# Altium PCB Pedal System Circuit.PcbDoc
Units mil, origin at the board's own origin, x right, y up, seen from the top; angles counter-clockwise.
Board outline 3187.01 x 2249.61 mil, 2 copper layers (Top, Bottom); 19 components, 18 nets, 84 pads, 0 vias.
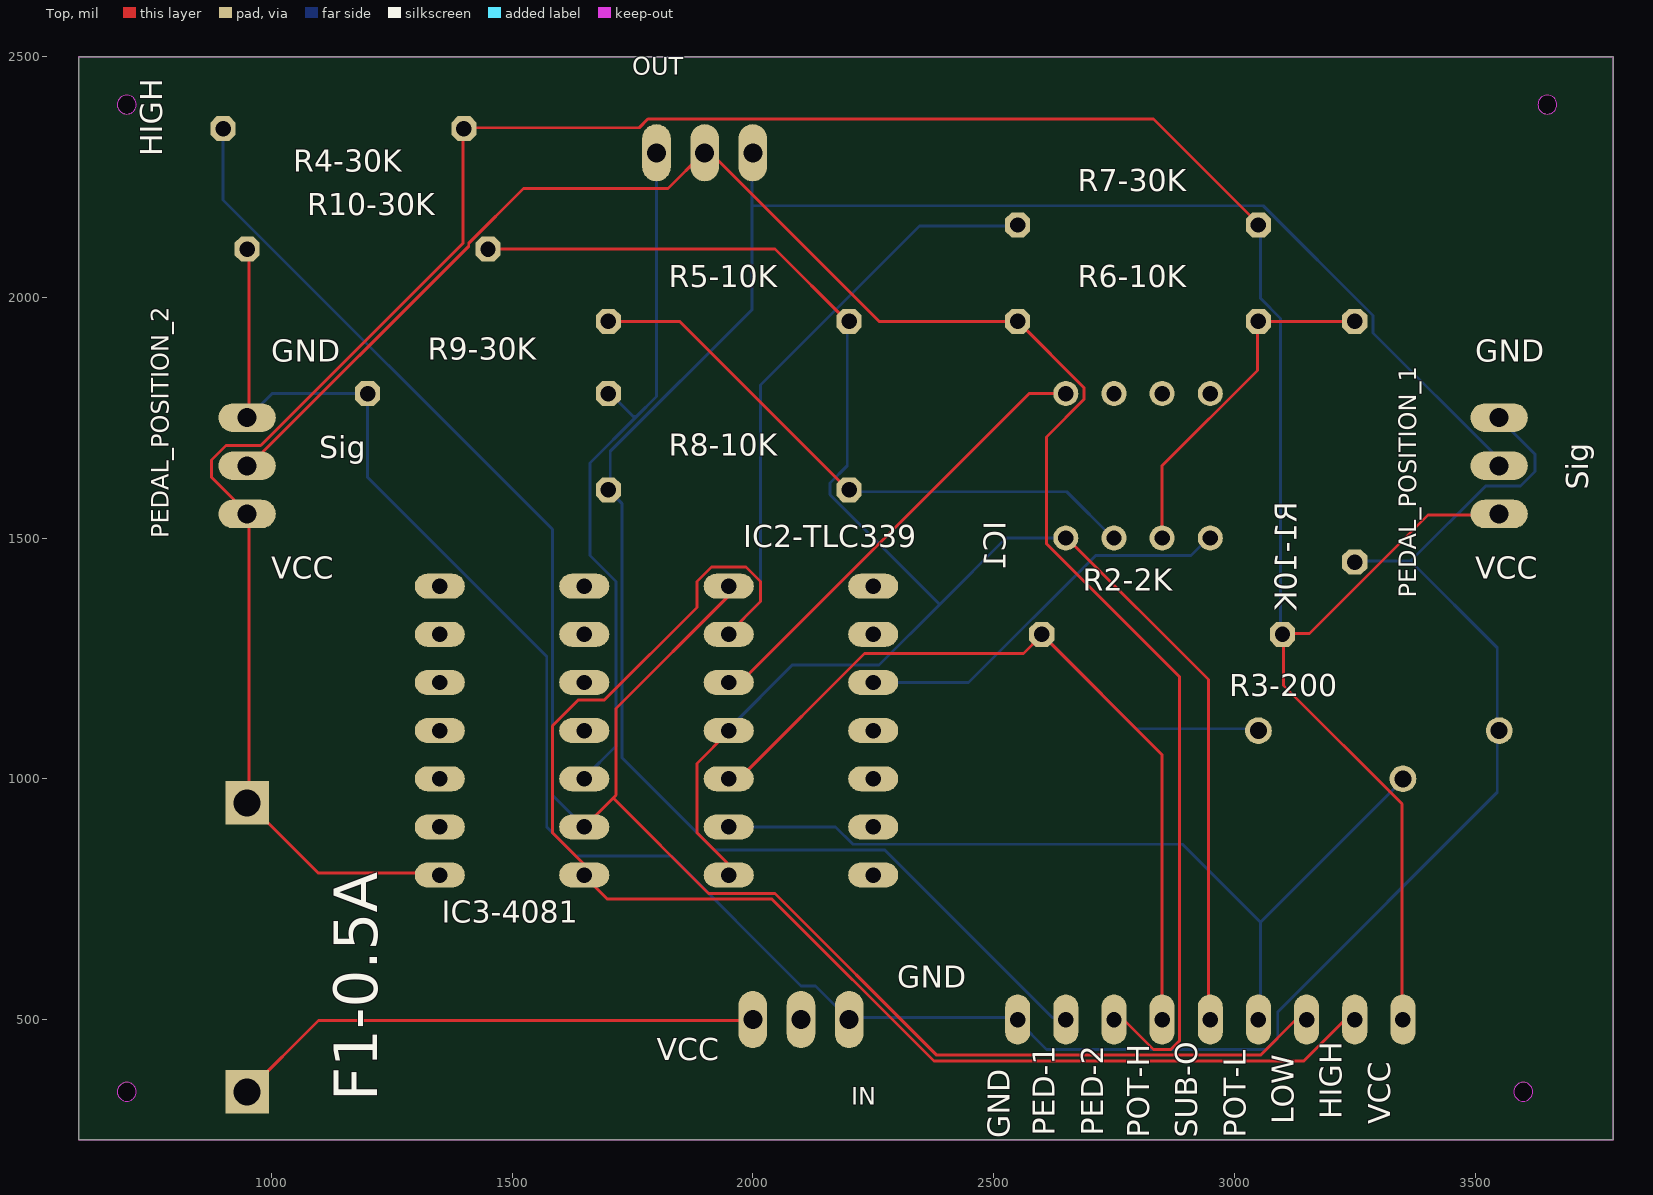
[diagram p0: Top view]
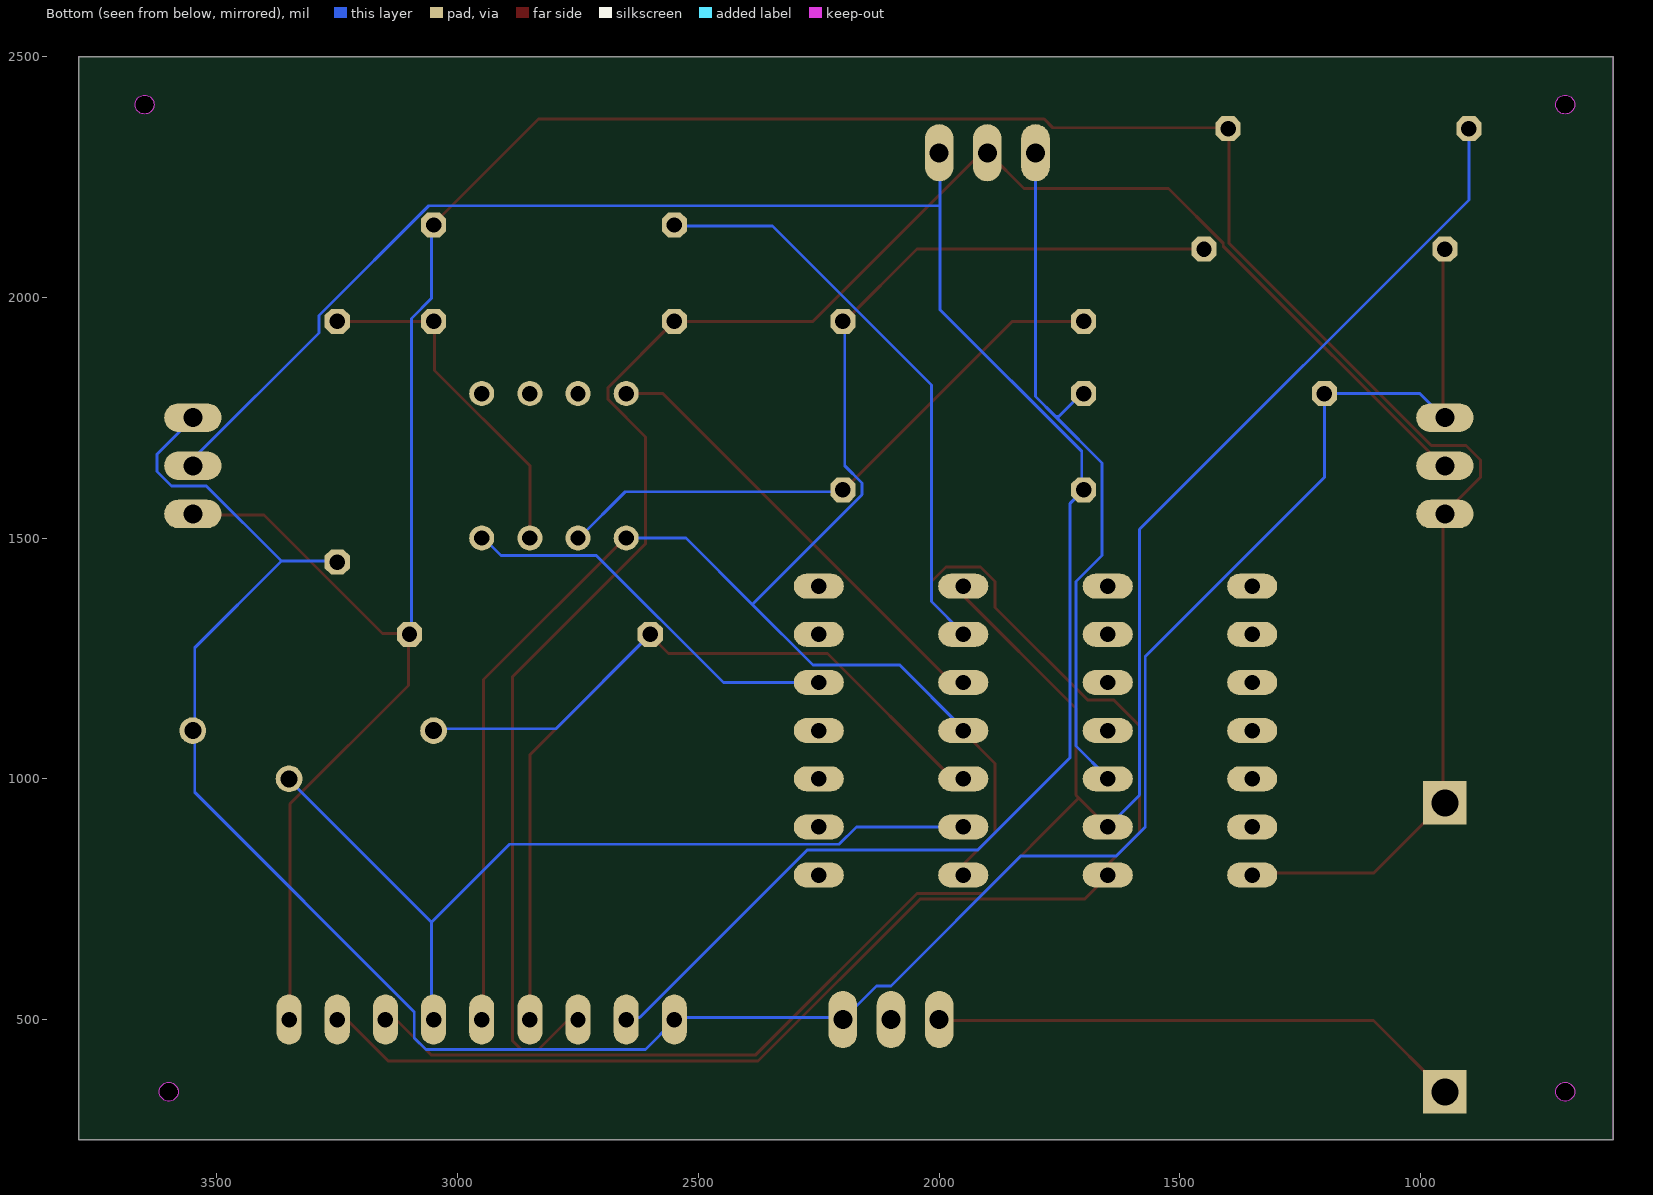
[diagram p1: Bottom view, seen from below]

## Layer stack, top to bottom
Top Solder: solder mask 0.4, Solder Resist, Dk 3.5
Top: signal copper 1.378
Dielectric 1: dielectric 12.6, FR-4, Dk 4.8
Bottom: signal copper 1.378
Bottom Solder: solder mask 0.4, Solder Resist, Dk 3.5

## Board outline
600,2499.61 600,250 3787.01,250 3787.01,2499.61
cut-out: 3600,330.31 ccw(c3600,350) 3619.68,350 ccw(c3600,350) 3600,369.69 ccw(c3600,350) 3580.32,350 ccw(c3600,350)
cut-out: 700,330.31 ccw(c700,350) 719.68,350 ccw(c700,350) 700,369.69 ccw(c700,350) 680.32,350 ccw(c700,350)
cut-out: 700,2380.32 ccw(c700,2400) 719.68,2400 ccw(c700,2400) 700,2419.68 ccw(c700,2400) 680.32,2400 ccw(c700,2400)
cut-out: 3650,2380.32 ccw(c3650,2400) 3669.68,2400 ccw(c3650,2400) 3650,2419.68 ccw(c3650,2400) 3630.32,2400 ccw(c3650,2400)

## Design rules (kind name [scope] priority, off if disabled: settings)
BoardOutlineClearance mdCopperDimension [All] p1: gap=10 ignorepadtopadclearanceinfootprint=FALSE except(0: Arc-SplitContinuation Track-SplitContinuation SMDPad-SplitContinuation THPad-SplitContinuation Via-SplitContinuation Fill-SplitContinuation Poly-SplitContinuation Region-SplitContinuation Text-SplitContinuation; 40: Poly-OutlineEdge Poly-CavityEdge Poly-CutoutEdge Poly-SplitBarrior)
Clearance "Clearance (Same Net)" [All] p1: gap=6 ignorepadtopadclearanceinfootprint=FALSE
Clearance [All] p2: gap=6 ignorepadtopadclearanceinfootprint=FALSE
HoleSize [All] p1: absolutevalues=TRUE maxlimit=100000 minlimit=13.78 maxpercent=80.000 minpercent=20.000
HoleToHoleClearance mdDrill [All] p1: gap=6 allowstackedmicrovias=TRUE
MinimumSolderMaskSliver [All] p1 off: minsoldermaskwidth=10
PasteMaskExpansion mlMinCreamFrame [All] p1: expansion=0
PolygonConnect PolygonConnect_For_PolygonThermal_ON_Width60000_Gap100000 [InPolygonClass('PolygonThermal_ON_Width60000_Gap100000') vs Not IsVia] p1: connectstyle=Relief reliefconductorwidth=6 reliefentries=4 polygonreliefangle="90 Angle" airgapwidth=10
PolygonConnect ThermalVias [IsVia] p2: connectstyle=Direct reliefconductorwidth=10 reliefentries=4 polygonreliefangle="90 Angle" airgapwidth=10
PolygonConnect [All] p3: connectstyle=Relief reliefconductorwidth=10 reliefentries=4 polygonreliefangle="90 Angle" airgapwidth=10
RoutingVias [All] p1: holewidth=13.78 width=29.78 viastyle="Through Hole" minholewidth=13.78 minwidth=29.78 maxholewidth=100 maxwidth=100
SolderMaskExpansion mlMinStopFrame [All] p1: expansion=4 istentingtop=FALSE
Width [All] p1: maxlimit=10 minlimit=6 preferedwidth=6
26 further rules are at their usual default settings.

## Classes and differential pairs
polygon class PolygonThermal_ON_Width60000_Gap100000: Polygon_1_Net_N$11 Polygon_1_Net_N$13

## Components (designator, comment, footprint, x,y, rotation, side; value= is the part's Value field where it differs from the comment)
F1-0.5A "FUSEBLANK_5X20MM" FUSE_HOLDER_5X20MM 950,350 r90 top
GND "" FE09W 2950,500 r0 top
IC1 "LM358N" DIL08 2800,1650 r0 top
IC2-TLC339 "TLC339P" DIL14 2100,1100 r270 top
IC3-4081 "4081N" DIL14 1500,1100 r90 top
IN "22-23-2031" 22-23-2031 2100,500 r180 top
OUT "22-23-2031" 22-23-2031 1900,2300 r0 top
PEDAL_POSITION_1 "22-23-2031" 22-23-2031 3550,1650 r270 top
PEDAL_POSITION_2 "22-23-2031" 22-23-2031 950,1650 r90 top
R1-10K "10k" 0207/12 3250,1700 r90 top
R2-2K "2k" 0309/12 2850,1300 r0 top
R3-200 "200" RTRIM43P 3350,1050 r0 top
R4-30K "30k" 0207/12 1150,2350 r180 top
R5-10K "10k" 0207/12 1950,1950 r0 top
R6-10K "10k" 0207/12 2800,1950 r0 top
R7-30K "30k" 0207/12 2800,2150 r0 top
R8-10K "10k" 0207/12 1950,1600 r0 top
R9-30K "30k" 0207/12 1450,1800 r0 top
R10-30K "30k" 0207/12 1200,2100 r0 top

## Footprints (in the part's own frame and the unit in brackets; to place one, negate y for a bottom-side part, rotate by r counter-clockwise, add the part's x,y. Pads: shape width x height; smd on the part's side, far side on the other; paste and mask are expansions set on the pad)
22-23-2031 [mm] "22-23-2031"
  oval 1.508x3.016 hole 1: 1(-2.54,0) 2(0,0) 3(2.54,0)
  body extent -3.3,-1.51 3.3,1.51, height 1.27
0207/12 [mil] "0207/12"
  oct 52x52 / inner round 48.04 / far side oct 52x52 hole 32: 1(-250,0) 2(250,0)
  body extent -274,-24 274,24, height 150
0309/12 [mil] "0309/12"
  oct 52x52 / inner round 48.04 / far side oct 52x52 hole 32: 1(-250,0) 2(250,0)
  body extent -274,-24 274,24, height 150
DIL08 [mil] "DIL08"
  round 52 hole 32: 1(-150,-150) 2(-50,-150) 3(50,-150) 4(150,-150) 5(150,150) 6(50,150) 7(-50,150) 8(-150,150)
  body extent -176,-176 176,176, height 50
DIL14 [mil] "DIL14"
  oval 52x104 hole 32: 1(-300,-150) 2(-200,-150) 3(-100,-150) 4(0,-150) 5(100,-150) 6(200,-150) 7(300,-150) 8(300,150) 9(200,150) 10(100,150) 11(0,150) 12(-100,150) 13(-200,150) 14(-300,150)
  body extent -326,-202 326,202, height 50
FE09W [mil] "FE09W"
  oval 52x104 hole 32: 1(-400,0) 2(-300,0) 3(-200,0) 4(-100,0) 5(0,0) 6(100,0) 7(200,0) 8(300,0) 9(400,0)
  body extent -426,-52 426,52, height 150
FUSE_HOLDER_5X20MM [mil] "FUSE_HOLDER_5X20MM"
  rect 90x90 / inner round 83.15 / far side rect 90x90 hole 56: 1(0,0) 2(600,0)
  body extent -42,-42 642,42, height 50
RTRIM43P [mil] "RTRIM43P"
  round 55.43 hole 35.43: 1(-300,50) 2(0,-50) 3(200,50)
  body extent -328,-78 228,78, height 50

## Part data
F1-0.5A: library part FUSE_HOLDER_5X20MM, PackageName=FUSE_HOLDER_5X20MM
GND: library part FE09W, PackageName=FE09W
IC1: library part DIL08, PackageName=DIL08
IC2-TLC339 IC3-4081: library part DIL14, PackageName=DIL14
R1-10K R4-30K R5-10K R6-10K R7-30K R8-10K R9-30K R10-30K: library part 0207/12, PackageName=0207/12
R2-2K: library part 0309/12, PackageName=0309/12
R3-200: library part RTRIM43P, PackageName=RTRIM43P
IN OUT PEDAL_POSITION_1 PEDAL_POSITION_2: PackageName=22-23-2031

## Free pads (board coordinates)
  round 39.37 hole 39.37 unplated: MH1(700,2400) MH2(3650,2400) MH3(3600,350) MH4(700,350)

## Nets (pads, with @x,y where several pads share a name; then routed paths per layer and width w, separated by ;. In a path a pad name is that pad's centre, name@x,y a point inside that pad or via, vN(x,y) a via of type N, cw(c..) or ccw(c..) an arc to the next point about the centre after c; other vN are vias at no path point)
GND: GND.1 IN.1 PEDAL_POSITION_1.1 PEDAL_POSITION_2.3 R1-10K.1 R3-200.3 R9-30K.1 R10-30K.1 | length 5259.6
  Top w6: PEDAL_POSITION_2.3 954,1752 954,2100 R10-30K.1
  Bottom w6: PEDAL_POSITION_2.3 954,1752 1002,1800 R9-30K.1 1200,1626 1572,1254 1572,900 1632,840 1830,840 2100,570 2130,570 IN.1 2202,504 2550,504 GND.1 2550,498 2610,438 3066,438 3090,462 3090,516 3546,972 3546,1098 R3-200.3 3546,1104 3546,1272 3366,1452 ; R1-10K.1 3252,1452 3366,1452 ; PEDAL_POSITION_1.1 3552,1746 3624,1674 3624,1638 3594,1608 3522,1608 3366,1452
HIGH: GND.8 IC2-TLC339.2 IC3-4081.1 R7-30K.1 | length 4101.8
  Top w6: IC2-TLC339.2 1950,1302 2016,1368 2016,1410 1986,1440 1914,1440 1884,1410 1884,1356 1692,1164 1638,1164 1584,1110 1584,888 1650,822 IC3-4081.1 1650,798 1698,750 2040,750 2376,414 3144,414 3228,498 3246,498 GND.8
  Bottom w6: IC2-TLC339.2 1950,1302 2016,1368 2016,1818 2346,2148 2550,2148 R7-30K.1
LOW: GND.7 IC2-TLC339.1 IC3-4081.2 R4-30K.2 | length 4077.9
  Top w6: IC3-4081.2 1710,960 ; IC2-TLC339.1 1950,1380 1716,1146 1716,966 1710,960 ; GND.7 3150,498 3126,498 3054,426 2382,426 2046,762 1908,762 1710,960
  Bottom w6: R4-30K.2 900,2202 1584,1518 1584,966 IC3-4081.2
N$3: IC1.3 R1-10K.2 R6-10K.2 | length 734
  Top w6: IC1.3 2850,1650 3048,1848 3048,1950 R6-10K.2 R1-10K.2
N$4: IC3-4081.3 OUT.1 R9-30K.2 | length 1484.7
  Bottom w6: IC3-4081.3 1650,1002 1716,1068 1716,1410 1662,1464 1662,1656 1758,1752 ; R9-30K.2 1704,1800 1752,1752 1758,1752 ; OUT.1 1800,1794 1758,1752
N$8: F1-0.5A.1 IN.3 | length 1112.1
  Top w6: F1-0.5A.1 1098,498 1998,498 IN.3
N$11: 
N$13: 
N$14: IC1.2 R5-10K.1 R8-10K.2 | length 1236.9
  Top w6: R5-10K.1 1848,1950 2196,1602 R8-10K.2
  Bottom w6: R8-10K.2 2202,1596 2652,1596 2748,1500 IC1.2
PEDAL_1: GND.2 OUT.3 PEDAL_POSITION_1.2 R8-10K.1 | length 4347.3
  Bottom w6: OUT.3 1998,2298 1998,2190 ; GND.2 2646,504 2622,504 2274,852 1920,852 1728,1044 1728,1572 R8-10K.1 1704,1602 1704,1680 1998,1974 1998,2190 ; PEDAL_POSITION_1.2 3546,1650 3546,1668 3288,1926 3288,1962 3060,2190 1998,2190
PEDAL_2: GND.3 OUT.2 PEDAL_POSITION_2.2 R6-10K.1 | length 3883.9
  Top w6: PEDAL_POSITION_2.2 954,1650 1410,2106 1410,2112 1524,2226 1824,2226 1896,2298 OUT.2 1902,2298 1914,2298 2262,1950 R6-10K.1 2688,1812 2688,1788 2610,1710 2610,1488 2886,1212 2886,456 2868,438 2832,438 2772,498 2754,498 GND.3
POT_ABOVE: GND.4 IC2-TLC339.5 R2-2K.1 R3-200.1 | length 2213.5
  Top w6: IC2-TLC339.5 1950,1002 1974,1002 2232,1260 2562,1260 2598,1296 R2-2K.1 2850,1050 GND.4
  Bottom w6: R2-2K.1 2796,1104 3048,1104 R3-200.1
POT_BELOW: GND.6 IC2-TLC339.6 R3-200.2 | length 1809.9
  Bottom w6: IC2-TLC339.6 2172,900 2208,864 2892,864 3054,702 ; GND.6 3054,504 3054,702 ; R3-200.2 3348,996 3054,702
SUB_OUT: GND.5 IC1.1 IC2-TLC339.4 IC2-TLC339.7 R5-10K.2 R10-30K.2 | length 3861.6
  Top w6: R10-30K.2 2046,2100 2196,1950 R5-10K.2 ; IC2-TLC339.7 1950,822 1884,888 1884,1032 1950,1098 IC2-TLC339.4 ; IC1.1 2652,1500 2946,1206 2946,504 GND.5
  Bottom w6: IC2-TLC339.4 1950,1104 2082,1236 2262,1236 2388,1362 ; R5-10K.2 2196,1950 2196,1650 2160,1614 2160,1590 2388,1362 ; IC1.1 2526,1500 2388,1362
V+: IC1.8 IC2-TLC339.3 | length 948.5
  Top w6: IC2-TLC339.3 1974,1200 2574,1800 IC1.8
V-: IC1.4 IC2-TLC339.12 | length 824.3
  Bottom w6: IC2-TLC339.12 2448,1200 2712,1464 2910,1464 2946,1500 IC1.4
VCC: F1-0.5A.2 GND.9 IC3-4081.14 PEDAL_POSITION_1.3 PEDAL_POSITION_2.1 R2-2K.2 R4-30K.1 R7-30K.2 | length 6235.7
  Top w6: IC3-4081.14 1350,804 1098,804 954,948 F1-0.5A.2 954,954 954,1548 PEDAL_POSITION_2.1 948,1554 876,1626 876,1662 906,1692 978,1692 1398,2112 1398,2346 R4-30K.1 1404,2352 1764,2352 1782,2370 2832,2370 3048,2154 R7-30K.2 ; GND.9 3348,504 3348,948 3102,1194 3102,1296 R2-2K.2 3102,1302 3156,1302 3402,1548 3546,1548 PEDAL_POSITION_1.3
  Bottom w6: R7-30K.2 3054,2148 3054,1998 3096,1956 3096,1302 R2-2K.2
VSS: IC3-4081.7
pads on no net: IC1.5 IC1.6 IC1.7 IC2-TLC339.8 IC2-TLC339.9 IC2-TLC339.10 IC2-TLC339.11 IC2-TLC339.13 IC2-TLC339.14 IC3-4081.4 IC3-4081.5 IC3-4081.6 IC3-4081.8 IC3-4081.9 IC3-4081.10 IC3-4081.11 IC3-4081.12 IC3-4081.13 IN.2

## Polygon pours and split planes (outlines as drawn)
N$11 on Top "Polygon_1_Net_N$11" (solid, remove dead copper, pour order 1): 447,2653 447,-153 4003,-153 4003,2653
N$13 on Bottom "Polygon_1_Net_N$13" (solid, remove dead copper, pour order 0): 497.05,2602.96 446.94,-153 4003,-153 4003,2653.04

## Keep-outs
Keep-Out Layer:
  the board outline again, w0

## Silkscreen, mask and mechanical layers (free items; w line width, h text height)
Top Overlay:
  text "HIGH" at 788.83,2292.75 h77.5 r90
  text "GND" at 1000,1850 h77.5
  text "GND" at 3500,1850 h77.5
  text "Sig" at 1100,1650 h77.5
  text "Sig" at 3750,1600 h77.5 r90
  text "VCC" at 1000,1400 h77.5
  text "VCC" at 3500,1400 h77.5
  text "GND" at 2300,550 h77.5
  text "VCC" at 1800,400 h77.5
  text "HIGH" at 3238.83,292.75 h77.5 r90
  text "LOW" at 3138.83,282.67 h77.5 r90
  text "VCC" at 3338.83,282.16 h77.5 r90
  text "PED-2" at 2742.83,259.02 h77.5 r90
  text "PED-1" at 2642.44,258.5 h77.5 r90
  text "POT-L" at 3038.83,254.76 h77.5 r90
  text "POT-H" at 2838.83,254.05 h77.5 r90
  text "SUB-O" at 2938.83,254.37 h77.5 r90
Dimension:
  the board outline again, w0

## Dimensions
3787.01,2499.61 to 600,2499.61 on Top
600,2499.61 to 600,250 on Top

## Text inside footprints (layer, text, board x,y; h text height)
GND: tPlace "8" at 3275,600 h77.5 r90; tPlace "7" at 3175,600 h77.5 r90; tPlace "6" at 3075,600 h77.5 r90; tPlace "4" at 2875,600 h77.5 r90; tPlace "3" at 2775,600 h77.5 r90; tPlace "5" at 2975,600 h77.5 r90; tPlace "9" at 3375,600 h77.5 r90; tPlace "2" at 2675,600 h77.5 r90